# Altium PCB Clock.PcbDoc
Units mm, origin at the board's own origin, x right, y up, seen from the top; angles counter-clockwise.
Board outline 90 x 30 mm, 2 copper layers (Top Layer, Bottom Layer); 35 components, 22 nets, 155 pads, 61 vias.
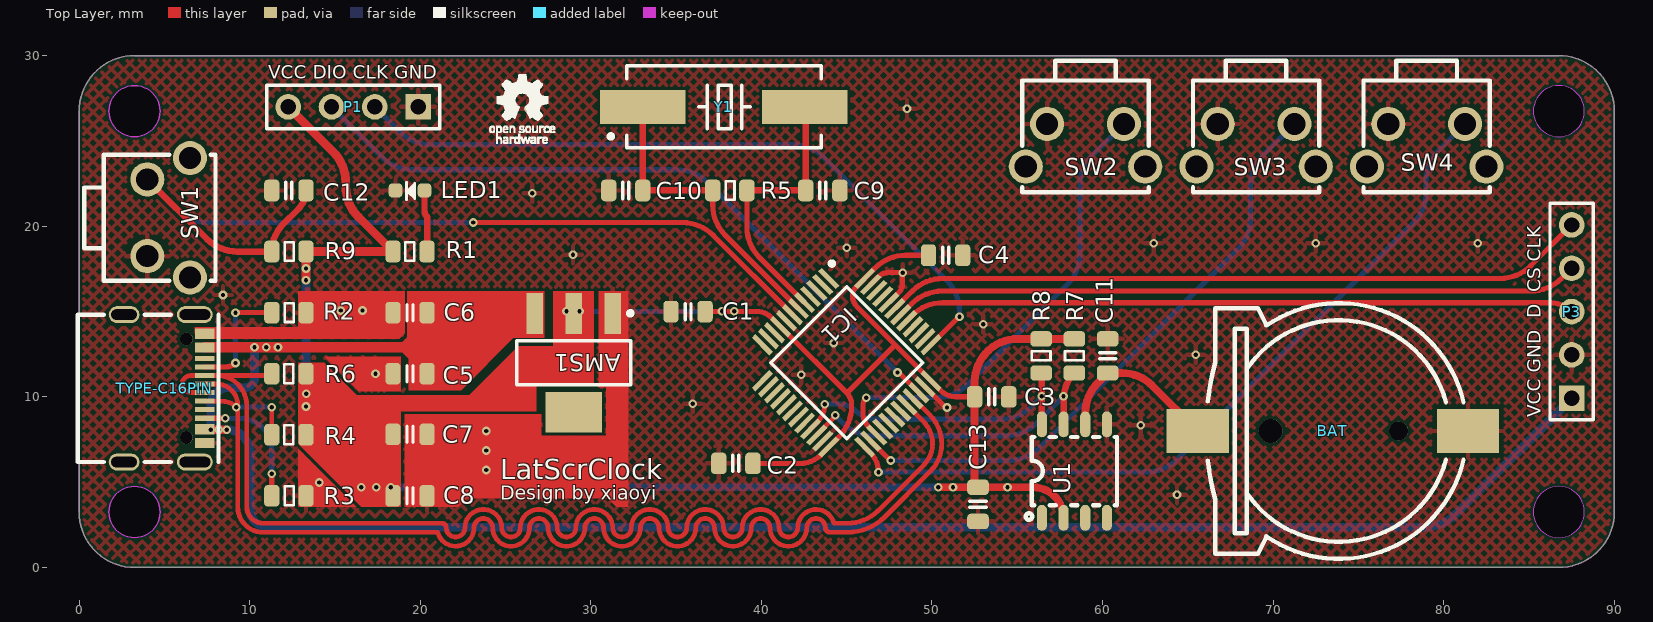
[diagram p0: Top Layer view]
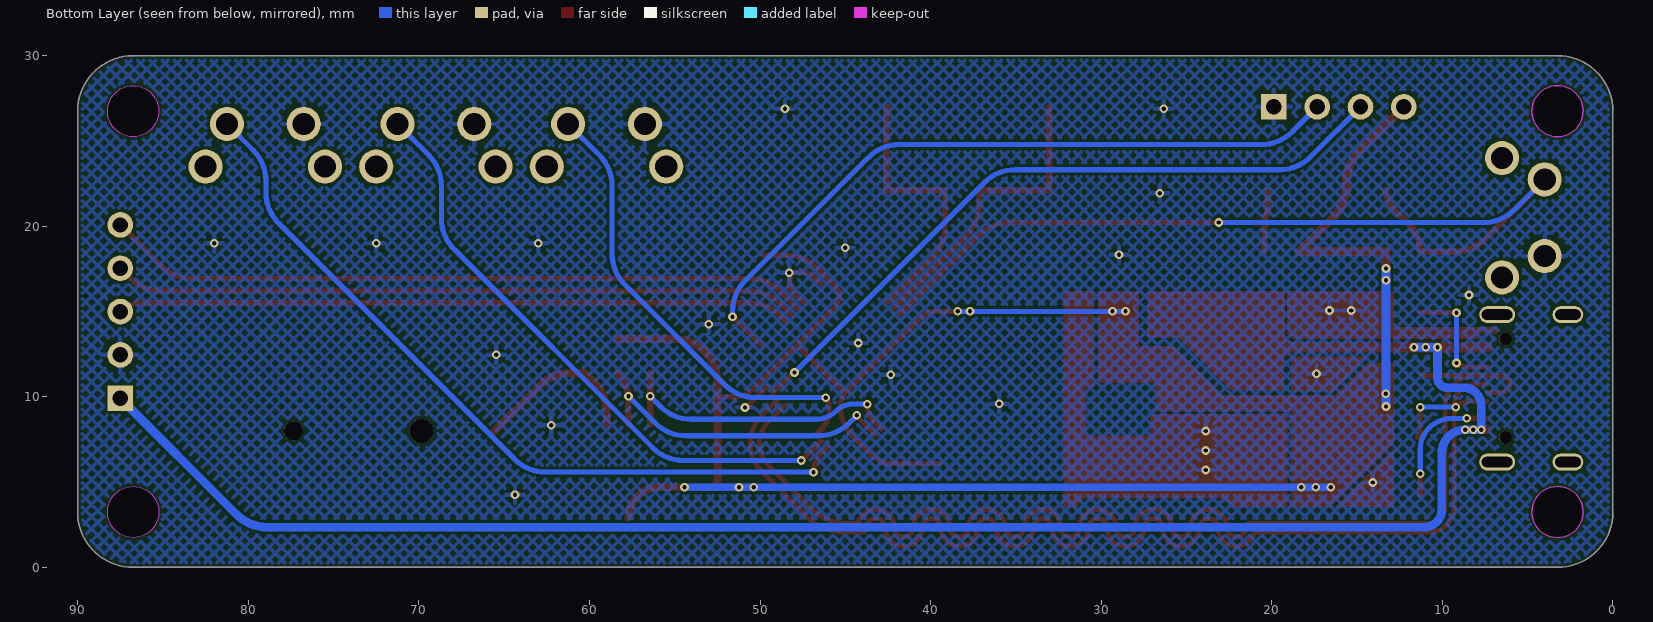
[diagram p1: Bottom Layer view, seen from below]

## Layer stack, top to bottom
Top Solder: solder mask 0.0102, Solder Resist, Dk 3.5
Top Layer: signal copper 0.0356
Dielectric 1: dielectric 0.32, FR-4, Dk 4.8
Bottom Layer: signal copper 0.0356
Bottom Solder: solder mask 0.0102, Solder Resist, Dk 3.5

## Board outline
3.25,0 cw(c3.25,3.25) 0,3.25 0,26.75 cw(c3.25,26.75) 3.25,30 86.75,30 cw(c86.75,26.75) 90,26.75 90,3.25 cw(c86.75,3.25) 86.75,0
cut-out: 3.25,1.75 cw(c3.25,3.25) 1.75,3.25 cw(c3.25,3.25) 3.25,4.75 cw(c3.25,3.25) 4.75,3.25 cw(c3.25,3.25)
cut-out: 3.25,25.25 cw(c3.25,26.75) 1.75,26.75 cw(c3.25,26.75) 3.25,28.25 cw(c3.25,26.75) 4.75,26.75 cw(c3.25,26.75)
cut-out: 85.25,26.75 ccw(c86.75,26.75) 86.75,25.25 ccw(c86.75,26.75) 88.25,26.75 ccw(c86.75,26.75) 86.75,28.25 ccw(c86.75,26.75)
cut-out: 85.25,3.25 ccw(c86.75,3.25) 86.75,1.75 ccw(c86.75,3.25) 88.25,3.25 ccw(c86.75,3.25) 86.75,4.75 ccw(c86.75,3.25)

## Design rules (kind name [scope] priority, off if disabled: settings)
Clearance [All] p1: gap=0.152 ignorepadtopadclearanceinfootprint=FALSE
ComponentClearance [All] p1: gap=0 collisioncheckmode=3 verticalgap=0.254 showdistances=FALSE
DiffPairsRouting [All] p1: maxlimit=0.254 minlimit=0.229 mostfreqgap=0.254 toplayer_minwidth=0.279 toplayer_maxwidth=0.279 toplayer_prefwidth=0.279 bottomlayer_minwidth=0.279 bottomlayer_maxwidth=0.279 bottomlayer_prefwidth=0.279 maxuncoupledlength=20.32
PolygonConnect [All] p1: connectstyle=Relief reliefconductorwidth=0.254 reliefentries=4 polygonreliefangle="90 Angle" airgapwidth=0.254
RoutingVias [All] p1: holewidth=0.711 width=1.27 viastyle="Through Hole" minholewidth=0.711 minwidth=1.27 maxholewidth=0.711 maxwidth=1.27
SolderMaskExpansion [All] p1: expansion=0.102
Width [All] p1: maxlimit=0.762 minlimit=0.254 preferedwidth=0.254
28 further rules are at their usual default settings.

## Components (designator, comment, footprint, x,y, rotation, side; value= is the part's Value field where it differs from the comment)
AMS1 "AMS1117" SOT223 29,12 r270 top
BAT "BAT-CR1220" BAT-CR1220 73.5,8 r0 top
C1 "100nf" C0805 35.7,15 r180 top
C2 "100nf" C0805 38.5,6.1 r180 top
C3 "100nf" C0805 53.5,10 r0 top
C4 "100nf" C0805 50.8,18.3 r0 top
C5 "10uf" C0805 19.4,11.36 r180 top
C6 "100nf" C0805 19.4,14.94 r180 top
C7 "10uf" C0805 19.4,7.805 r0 top
C8 "100nf" C0805 19.4,4.2 r0 top
C9 "20pf" C0805 43.6,22.1 r180 top
C10 "20pf" C0805 32.05,22.1 r0 top
C11 "100nf" C0805 60.3,12.4 r270 top
C12 "100nf" C0805 12.3,22.1 r180 top
C13 "100nf" C0805 52.7,3.7 r270 top
IC1 "STM32F103C8T6" QFP50P900X900X160-48N 45,12 r315 top
LED1 "LED" LED0603-Orange 19.4,22.1 r180 top
P1 "Header 4" HDR1X4 19.88,27 r180 top
P3 "Header 5" HDR1X5 87.5,9.92 r90 top
R1 "3.3k" R0805 20.4,18.52 r180 top
R2 "NC" R0805 11.3,14.94 r0 top
R3 "NC" R0805 11.3,4.2 r0 top
R4 "10k" R0805 13.3,7.78 r180 top
R5 "1M" R0805 37.15,22.1 r0 top
R6 "10k" R0805 13.3,11.36 r180 top
R7 "10k" R0805 58.35,11.4 r90 top
R8 "10k" R0805 56.4,11.4 r90 top
R9 "10k" R0805 11.3,18.52 r0 top
SW1 "DTSA-63N-V-T/R" SW-TH_DTSA-63N-V-T/R 5.25,20.5 r270 top
SW2 "DTSA-63N-V-T/R" SW-TH_DTSA-63N-V-T/R 59,24.75 r180 top
SW3 "DTSA-63N-V-T/R" SW-TH_DTSA-63N-V-T/R 69,24.75 r180 top
SW4 "DTSA-63N-V-T/R" SW-TH_DTSA-63N-V-T/R 79,24.75 r180 top
TYPE-C16PIN "USB" USB3.0-TYPE-C-SMD_16PIN-H-PITCH0.50 5,10.5 r270 top
U1 "DS3231MZ+" SOIC-8_L4.9-W3.9-P1.27-LS6.0-BL 58.35,5.65 r0 top
Y1 "8Mhz" XTAL_49S-SMD 37.8,27 r0 top

## Footprints (in the part's own frame and the unit in brackets; to place one, negate y for a bottom-side part, rotate by r counter-clockwise, add the part's x,y. Pads: shape width x height; smd on the part's side, far side on the other; paste and mask are expansions set on the pad)
BAT-CR1220 [mm] "CR1220"
  round 1.4 hole 1.4 unplated: 0(-3.645,0)
  round 1.1 hole 1.1 unplated: 0(3.855,0)
  rect 3.66x2.6 smd: 1(-7.925,0) 2(7.925,0)
  silkscreen extent -7.33,-7.5 7.66,7.5, body extent -9.14,-7.5 9.36,7.5, height 4
C0805 [mm] "C0805 瓷片电容"
  rrect50% 0.9x1.27 smd: 1(-1,0) 2(1,0)
  silkscreen extent -0.17,-0.48 0.18,0.48, body extent -1,-0.64 1.03,0.64, height 0.41
HDR1X4 [mm] "Connector; Header; 4 Position"
  rect 1.5x1.5 hole 0.9: 1(0,0)
  round 1.5 hole 0.9: 2(2.54,0) 3(5.08,0) 4(7.62,0)
  silkscreen extent -1.27,-1.27 8.89,1.27
HDR1X5 [mm] "Connector; Header; 5 Position"
  rect 1.5x1.5 hole 0.9: 1(0,0)
  round 1.5 hole 0.9: 2(2.54,0) 3(5.08,0) 4(7.62,0) 5(10.16,0)
  silkscreen extent -1.27,-1.27 11.43,1.27
LED0603-Orange [mm] "橙色LED0603"
  rrect50% 0.8x0.813 smd: 1(-0.85,0) 2(0.85,0)
  silkscreen extent -0.28,-0.48 0.2,0.53, body extent -1,-0.53 1.01,0.54, height 0.46
QFP50P900X900X160-48N [mm]
  rect 1.475x0.3 smd: 1(-4.238,2.75) 2(-4.238,2.25) 3(-4.238,1.75) 4(-4.238,1.25) 5(-4.238,0.75) 6(-4.238,0.25) 7(-4.238,-0.25) 8(-4.238,-0.75) 9(-4.238,-1.25) 10(-4.238,-1.75) 11(-4.238,-2.25) 12(-4.238,-2.75) 25(4.238,-2.75) 26(4.238,-2.25) 27(4.238,-1.75) 28(4.238,-1.25) 29(4.238,-0.75) 30(4.238,-0.25) 31(4.238,0.25) 32(4.238,0.75) 33(4.238,1.25) 34(4.238,1.75) 35(4.238,2.25) 36(4.238,2.75)
  rect 0.3x1.475 smd: 13(-2.75,-4.238) 14(-2.25,-4.238) 15(-1.75,-4.238) 16(-1.25,-4.238) 17(-0.75,-4.238) 18(-0.25,-4.238) 19(0.25,-4.238) 20(0.75,-4.238) 21(1.25,-4.238) 22(1.75,-4.238) 23(2.25,-4.238) 24(2.75,-4.238) 37(2.75,4.238) 38(2.25,4.238) 39(1.75,4.238) 40(1.25,4.238) 41(0.75,4.238) 42(0.25,4.238) 43(-0.25,4.238) 44(-0.75,4.238) 45(-1.25,4.238) 46(-1.75,4.238) 47(-2.25,4.238) 48(-2.75,4.238)
  silkscreen extent -4.85,-3.15 3.15,3.62, body extent -4.5,-4.5 4.5,4.5, height 1.6
R0805 [mm]
  rrect50% 0.9x1.27 smd: 1(0,0) 2(2,0)
  silkscreen extent 0.75,-0.55 1.28,0.55, body extent 0,-0.64 2.03,0.63, height 0.41
SOIC-8_L4.9-W3.9-P1.27-LS6.0-BL [mm]
  oval 0.6x1.518 smd: 1(-1.905,-2.74) 2(-0.635,-2.74) 3(0.635,-2.74) 4(1.905,-2.74) 5(1.905,2.74) 6(0.635,2.74) 7(-0.635,2.74) 8(-1.905,2.74)
  silkscreen extent -2.86,-2.86 2.5,2, body extent -2.45,-3 2.45,3, height 1.75
SOT223 [mm] "SOT223, 4-Leads, Body 6.7x7.3mm (max), Pitch 2.29mm, IPC Medium Density"
  rect 2.4x0.95 smd: 1(-2.9,2.29) 2(-2.9,0) 3(-2.9,-2.29)
  rect 2.4x3.3 smd: 4(2.9,0)
  silkscreen extent -3.02,-3.35 1.3,3.44, body extent -3.65,-3.35 3.65,3.35, height 1.8
SW-TH_DTSA-63N-V-T/R [mm]
  round 2 hole 1.3: 1(-2.25,-1.25) 2(2.25,-1.25) 3(-3.5,1.25) 4(3.5,1.25)
  silkscreen extent -3.7,-4.95 3.7,2.75, body extent -3.7,-5.05 3.7,2.85, height 7.01
USB3.0-TYPE-C-SMD_16PIN-H-PITCH0.50 [mm]
  oval 1x2.099 hole 0.61 slot 1.8 at 90 deg: 1(-4.32,1.787) 2(4.32,1.787)
  oval 1x1.799 hole 0.61 slot 1.5 at 90 deg: 3(-4.32,-2.363) 4(4.32,-2.363)
  rect 0.6x1.15 smd: A1B12(-3.2,2.363) A4B9(-2.4,2.363) B1A12(3.2,2.363) B4A9(2.4,2.363)
  rect 0.3x1.15 smd: A5(-1.25,2.363) A6(-0.25,2.363) A7(0.25,2.363) A8(-1.75,2.363) B5(1.75,2.363) B6(0.75,2.363) B7(-0.75,2.363) B8(1.25,2.363)
  round 0.75 hole 0.75 unplated: ""(-2.89,1.288) ""(2.89,1.288)
  silkscreen extent -4.32,-5.08 4.32,3.18, body extent -4.47,-4.95 4.47,2.63, height 3.25
XTAL_49S-SMD [mm] "贴片"
  rect 5x2 smd: 1(-4.75,0) 2(4.75,0)
  silkscreen extent -6.75,-2.4 5.7,2.4, body extent -6.7,-2.46 6.7,2.44, height 4

## Part data
AMS1: "Power"
C1 C2 C3 C4 C5 C6 C7 C8 C9 C10 C11 C12 C13: library part CAP, "无极电容", accuracy=20%
IC1: "Integrated Circuit", Manufacturer_Name=STMicroelectronics, Mouser Part Number=511-STM32F103C8T6, RS Part Number=0402279P, Allied_Number=70390993, Allied Price/Stock=http://www.alliedelec.com/stmicroelectronics-stm32f103c8t6/70390993/, Datasheet Link=http://www.st.com/st-web-ui/static/active/en/resource/technical/document/datasheet/CD00161566.pdf, Height=1.6mm, Manufacturer_Part_Number=STM32F103C8T6, Mouser Price/Stock=https://www.mouser.com/Search/Refine.aspx?Keyword=511-STM32F103C8T6, RS Price/Stock=http://uk.rs-online.com/web/p/products/0402279P
LED1: "发光二极管"
P1: "Header, 4-Pin", LatestRevisionDate=17-Jul-2002, LatestRevisionNote="Re-released for DXP Platform.", Publisher="Altium Limited"
P3: "Header, 5-Pin", LatestRevisionDate=17-Jul-2002, LatestRevisionNote="Re-released for DXP Platform.", Publisher="Altium Limited"
R1 R2 R3 R4 R5 R6 R7 R8 R9: library part RES, "电阻"
SW1 SW2 SW3 SW4: library part KEY_ASIDE_DTSA-63N-V-T/R, BOM_Manufacturer=Diptronics, BOM_Manufacturer Part=DTSA-63N-V-T/R, BOM_Supplier=LCSC, BOM_Supplier Part=C483865, Contributor=LCSC, spicePre=S, spiceSymbolName=DTSA-63N-V-T/R
TYPE-C16PIN: library part type-c-16p
U1: BOM_LCSC Assembly=Yes, BOM_Manufacturer=MAXIM, BOM_Manufacturer Part=DS3231MZ+, BOM_Supplier=LCSC, BOM_Supplier Part=C107410, SMT Type=Extend, spicePre=U, spiceSymbolName=DS3231MZ+
Y1: library part XTAL, "无源晶振"

## Via types
v1: diameter 0.508, hole 0.254, Top Layer to Bottom Layer, tented both sides, 61 vias

## Nets (pads, with @x,y where several pads share a name; then routed paths per layer and width w, separated by ;. In a path a pad name is that pad's centre, name@x,y a point inside that pad or via, vN(x,y) a via of type N, cw(c..) or ccw(c..) an arc to the next point about the centre after c; other vN are vias at no path point)
3V3: AMS1.2 C1.1 C2.1 C3.1 C4.1 C7.1 C8.1 C13.1 IC1.9 IC1.24 IC1.36 IC1.48 P1.4 R1.2 R4.1 R6.1 R7.2 R8.2 R9.2 U1.2 | length 133.2
  Top Layer w0.305: C1.1 cw(c36.728,14.972) 36.728,15.011 v1(37.694,15.011) v1(38.405,15.011) 39.7,15.011 cw(c39.7,13.754) 40.589,14.643 IC1.9 45.01,10.222 ; C2.1 39.504,6.096 42.266,6.096 ccw(c42.266,7.833) 43.494,6.605 IC1.24 44.544,7.655 ccw(c42.748,9.451) 45.288,9.451 45.288,9.55 ccw(c44.338,9.55) 45.01,10.222 ; 47.808,13.081 cw(c47.662,13.081) 47.766,12.978 45.01,10.222 ; C4.1 48.463,18.3 ccw(c48.463,15.76) 46.667,17.556 IC1.48 45.553,16.442 ccw(c46.069,15.926) 45.339,15.926 ccw(c46.246,15.926) 45.605,15.284 IC1.36 50.526,10.363 ccw(c51.384,11.221) 51.384,10.008 52.492,10.008 C3.1
  Top Layer w0.457: v1(50.368,4.7) v1(51.232,4.7) C13.1 ; U1.2 ccw(c55.925,2.91) 55.925,4.7 v1(54.432,4.7) C13.1 ; R7.2 R8.2 55.04,13.4 ccw(c55.04,10.86) 52.5,10.86 C3.1 52.5,5.183 ccw(c53.183,5.183) C13.1
  Top Layer w0.508: P1.4 14.89,24.37 cw(c13.094,22.574) 15.634,22.574 15.634,22.338 ccw(c18.174,22.338) 16.378,20.542 R1.2 R9.2 v1(13.3,16.84)
  Bottom Layer w0.305: v1(28.575,15.011) v1(37.694,15.011) v1(38.405,15.011)
  Bottom Layer w0.457: v1@16.535,4.692 v1(16.543,4.7) v1(50.368,4.7) v1(51.232,4.7) v1(54.432,4.7)
  Bottom Layer w0.508: v1(13.3,9.433) v1(13.3,16.84) v1(13.3,17.526)
  other v1: 17.424,4.7 18.263,4.7 13.31,10.185 29.337,15.011
CLK: IC1.43 P3.5 | length 41.5
  Top Layer w0.305: IC1.43 48.844,16.197 cw(c50.64,14.401) 50.64,16.941 83.309,16.941 ccw(c83.309,19.481) 85.105,17.685 P3.5
CS: IC1.42 P3.4 | length 40.2
  Top Layer w0.305: IC1.42 48.815,15.461 cw(c50.611,13.665) 50.611,16.205 85.113,16.205 ccw(c85.113,18.745) 86.909,16.949 P3.4
DATA: IC1.41 P3.3 | length 39.4
  Top Layer w0.305: IC1.41 48.836,14.775 cw(c50.632,12.979) 50.632,15.519 86.246,15.519 cw(c86.246,13.746) P3.3
GND: AMS1.1 BAT.2 C1.2 C2.2 C3.2 C4.2 C5.2 C6.2 C7.2 C8.2 C9.1 C10.1 C11.1 C12.2 C13.2 IC1.8 IC1.23 IC1.35 IC1.44 IC1.47 LED1.2 P1.1 P3.2 R2.2 R3.2 SW1.2 SW2.2 SW3.2 SW4.2 TYPE-C16PIN.A1B12 TYPE-C16PIN.B1A12 U1.5 | length 6
  Top Layer w0.305: IC1.47 46.845,17.027 cw(c47.498,16.374) 47.498,17.297 48.224,17.297 cw(c48.224,17.211) v1(48.285,17.272) ccw(c48.347,17.211) 48.26,17.211 48.26,16.586 cw(c47.619,16.586) 48.072,16.133 IC1.44 ; IC1.35 50.762,9.42 ccw(c50.876,9.534) v1(50.876,9.373)
  other v1: 64.364,4.267 14.072,4.978 23.876,5.715 23.876,6.858 23.876,8 62.23,8.331 35.966,9.601 42.342,11.303 17.374,11.354 65.456,12.471 44.247,13.157 53.01,14.259 15.342,15.062 16.612,15.062 8.433,15.977 28.956,18.339 45.009,18.745 62.992,18.999 72.5,18.999 81.991,18.999 26.568,21.946 26.34,26.899 48.539,26.899
KEY1: IC1.27 SW2.1 | length 27.5
  Top Layer w0.305: v1(46.152,9.957) ccw(c46.642,9.466) 45.949,9.466 45.949,9.093 ccw(c47.196,9.093) 46.314,8.211 IC1.27
  Bottom Layer w0.305: v1(46.152,9.957) 50.256,9.957 ccw(c50.256,12.497) 52.052,10.701 57.93,16.579 ccw(c56.134,18.375) 58.674,18.375 58.674,22.372 cw(c61.214,22.372) 59.418,24.168 SW2.1
KEY2: IC1.26 SW3.1 | length 35.5
  Top Layer w0.305: IC1.26 47.523,6.295 ccw(c47.574,6.346) v1(47.574,6.274)
  Bottom Layer w0.305: v1(47.574,6.274) 54.498,6.274 ccw(c54.498,8.814) 56.294,7.018 67.938,18.662 ccw(c66.142,20.458) 68.682,20.458 68.682,22.379 cw(c71.222,22.379) 69.426,24.175 SW3.1
KEY3: IC1.25 SW4.1 | length 45.9
  Top Layer w0.305: IC1.25 46.396,6.715 cw(c45.27,5.588) v1(46.863,5.588)
  Bottom Layer w0.305: v1(46.863,5.588) 62.575,5.588 ccw(c62.575,8.128) 64.371,6.332 78.225,20.186 ccw(c76.429,21.982) 78.969,21.982 78.969,22.666 cw(c81.509,22.666) 79.713,24.462 SW4.1
NetBAT_1: BAT.1 C11.2 U1.6 | length 10
  Top Layer w0.457: U1.6 58.985,9.033 cw(c61.525,9.033) 59.729,10.829 C11.2 61.123,11.4 cw(c61.123,8.86) 62.919,10.656 BAT.1
NetC9_2: C9.2 IC1.5 R5.2 Y1.2 | length 16.2
  Top Layer w0.305: R5.2 39.15,19.963 ccw(c41.69,19.963) 39.894,18.167 IC1.5
  Top Layer w0.381: R5.2 C9.2 42.6,26.879 ccw(c42.429,26.879) Y1.2
NetC10_2: C10.2 IC1.6 R5.1 Y1.1 | length 17.9
  Top Layer w0.305: R5.1 37.15,21.256 ccw(c39.69,21.256) 37.894,19.46 IC1.6
  Top Layer w0.381: Y1.1 C10.2 R5.1
NetLED1_1: LED1.1 R1.1 | length 3.6
  Top Layer w0.381: LED1.1 20.25,20.891 ccw(c20.662,20.891) 20.371,20.599 cw(c20.3,20.529) 20.4,20.529 R1.1
NetR2_1: R2.1 TYPE-C16PIN.A5 | length 7
  Top Layer w0.305: TYPE-C16PIN.A5 8.593,11.75 ccw(c8.593,12.565) v1(9.169,11.989) ; v1(9.169,14.94) R2.1
  Bottom Layer w0.305: v1(9.169,11.989) v1(9.169,14.94)
NetR3_1: R3.1 TYPE-C16PIN.B5 | length 7.7
  Top Layer w0.305: TYPE-C16PIN.B5 8.53,8.75 cw(c8.53,8.708) v1(8.56,8.738) ; R3.1 v1(11.3,5.5)
  Bottom Layer w0.305: v1(8.56,8.738) 9.449,8.738 cw(c9.449,6.886) 11.3,6.886 v1(11.3,5.5)
RESET: C12.1 IC1.7 R9.1 SW1.1 | length 54.1
  Top Layer w0.305: v1(23.114,20.218) 35.376,20.218 cw(c35.376,17.678) 37.172,19.474 IC1.7
  Top Layer w0.381: SW1.1 7.486,19.264 ccw(c9.282,21.06) 9.282,18.52 R9.1 cw(c13.553,18.52) 11.96,20.113 12.843,20.996 ccw(c11.739,22.1) C12.1
  Bottom Layer w0.305: SW1.1 5.788,20.962 ccw(c7.584,22.758) 7.584,20.218 v1(23.114,20.218)
SCL: IC1.21 R8.1 U1.8 | length 18.2
  Top Layer w0.305: IC1.21 43.268,8.5 ccw(c42.192,9.576) v1(43.713,9.576)
  Top Layer w0.381: R8.1 cw(c56.291,11.291) 56.445,11.291 U1.8
  Bottom Layer w0.305: v1(43.713,9.576) 44.561,9.576 cw(c44.561,8.188) 45.542,9.169 ccw(c46.707,10.335) 46.707,8.687 54.04,8.687 ccw(c54.04,11.227) 55.837,9.431 v1(56.439,10.033)
SDA: IC1.22 R7.1 U1.7 | length 19.4
  Top Layer w0.305: IC1.22 44.275,8.801 ccw(c44.161,8.915) v1(44.323,8.915)
  Top Layer w0.381: U1.7 57.715,9.867 cw(c59.883,9.867) R7.1
  Bottom Layer w0.305: v1(44.323,8.915) 44.773,8.466 ccw(c46.569,10.262) 46.569,7.722 54.345,7.722 ccw(c54.345,10.262) 56.141,8.466 v1(57.709,10.033)
SWCLK: IC1.37 P1.2 | length 42.2
  Top Layer w0.305: IC1.37 v1@51.584,14.694 ; v1@51.584,14.695 cw(c51.613,14.665) v1(51.613,14.707)
  Bottom Layer w0.305: P1.2 18.806,25.534 ccw(c20.602,27.33) 20.602,24.79 41.848,24.79 cw(c41.848,22.25) 43.645,24.046 50.869,16.822 cw(c49.073,15.026) 51.613,15.026 v1(51.613,14.707)
SWDIO: IC1.34 P1.3 | length 41.2
  Top Layer w0.305: v1(47.981,11.43) cw(c47.981,11.275) 48.09,11.385 IC1.34
  Bottom Layer w0.305: P1.3 17.739,24.061 ccw(c19.535,25.857) 19.535,23.317 35.041,23.317 cw(c35.041,20.777) 36.837,22.573 v1(47.981,11.43)
USB_DM: IC1.32 R6.2 TYPE-C16PIN.A7 TYPE-C16PIN.B7 | length 74.5
  Top Layer w0.279: TYPE-C16PIN.A7 6.545,10.25 cw(c6.545,10.75) 6.045,10.75 cw(c6.545,10.75) 6.545,11.25 TYPE-C16PIN.B7 8.077,11.25 ; R6.2 cw(c11.034,11.626) 11.034,11.25 8.077,11.25 ; IC1.32 49.484,8.577 cw(c48.146,7.239) 50.038,7.239 cw(c48.321,7.239) 49.535,6.025 46.845,3.335 cw(c45.049,5.131) 45.049,2.591 44.251,2.591 ccw(c43.205,2.324) 42.126,2.324 cw(c41.58,2.324) 41.034,2.324 ccw(c39.954,2.324) 38.875,2.324 cw(c38.329,2.324) 37.782,2.324 ccw(c36.703,2.324) 35.623,2.324 cw(c35.077,2.324) 34.531,2.324 ccw(c33.452,2.324) 32.372,2.324 cw(c31.826,2.324) 31.28,2.324 ccw(c30.201,2.324) 29.121,2.324 cw(c28.575,2.324) 28.029,2.324 ccw(c26.949,2.324) 25.87,2.324 cw(c25.324,2.324) 24.778,2.324 ccw(c23.698,2.324) 22.619,2.324 cw(c22.073,2.324) 21.526,2.324 ccw(c21.26,2.324) 21.26,2.591 10.795,2.591 cw(c10.795,3.556) 9.83,3.556 9.83,9.497 ccw(c8.077,9.497) 8.077,11.25
USB_DP: IC1.33 R4.2 TYPE-C16PIN.A6 TYPE-C16PIN.B6 | length 75.3
  Top Layer w0.279: TYPE-C16PIN.B6 8.375,9.75 cw(c8.375,8.555) v1(9.22,9.4) ; TYPE-C16PIN.A6 8.077,10.75 cw(c8.077,9.531) 9.296,9.531 9.296,3.556 ccw(c10.795,3.556) 10.795,2.057 21.027,2.057 ccw(c22.073,2.324) 23.152,2.324 cw(c23.698,2.324) 24.244,2.324 ccw(c25.324,2.324) 26.403,2.324 cw(c26.949,2.324) 27.495,2.324 ccw(c28.575,2.324) 29.654,2.324 cw(c30.201,2.324) 30.747,2.324 ccw(c31.826,2.324) 32.906,2.324 cw(c33.452,2.324) 33.998,2.324 ccw(c35.077,2.324) 36.157,2.324 cw(c36.703,2.324) 37.249,2.324 ccw(c38.329,2.324) 39.408,2.324 cw(c39.954,2.324) 40.5,2.324 ccw(c41.58,2.324) 42.659,2.324 cw(c43.205,2.324) 43.752,2.324 ccw(c44.018,2.324) 44.018,2.057 45.049,2.057 ccw(c45.049,5.131) 47.222,2.958 49.912,5.648 ccw(c48.321,7.239) 50.571,7.239 ccw(c48.146,7.239) 49.861,8.954 IC1.33@48.904,9.911 ; v1(11.3,9.4) R4.2 R4.2@11.47,7.61
  Bottom Layer w0.279: v1(9.22,9.4) v1(11.3,9.4)
VCC: AMS1.3 C5.1 C6.1 P3.1 TYPE-C16PIN.A4B9 TYPE-C16PIN.B4A9 | length 113.2
  Top Layer w0.508: TYPE-C16PIN.B4A9 ccw(c7.385,8.1) 7.385,8.077 v1(7.722,8.077) v1(8.191,8.077) v1(8.661,8.077) ; C5.1 20.4,11.496 18.996,12.9 20.4,14.304 C6.1
  Top Layer w0.61: TYPE-C16PIN.A4B9 v1(10.287,12.9) 18.996,12.9
  Bottom Layer w0.508: v1@10.287,12.849 10.287,11.125 cw(c9.703,11.125) 9.703,10.541 8.763,10.541 ccw(c8.763,9.5) 7.722,9.5 v1(7.722,8.077) v1(8.191,8.077) v1(8.661,8.077) cw(c8.661,6.706) 10.033,6.706 10.033,3.378 ccw(c11.049,3.378) 11.049,2.362 78.89,2.362 ccw(c78.89,4.902) 80.686,3.106 P3.1 ; v1(10.287,12.9) 10.287,12.903 v1(10.973,12.903) v1(11.659,12.903)
pads on no net: AMS1.4 BAT.0 IC1.1 IC1.2 IC1.3 IC1.4 IC1.10 IC1.11 IC1.12 IC1.13 IC1.14 IC1.15 IC1.16 IC1.17 IC1.18 IC1.19 IC1.20 IC1.28 IC1.29 IC1.30 IC1.31 IC1.38 IC1.39 IC1.40 IC1.45 IC1.46 SW1.3 SW1.4 SW2.3 SW2.4 SW3.3 SW3.4 SW4.3 SW4.4 TYPE-C16PIN. TYPE-C16PIN.1 TYPE-C16PIN.2 TYPE-C16PIN.3 TYPE-C16PIN.4 TYPE-C16PIN.A8 TYPE-C16PIN.B8 U1.1 U1.3 U1.4

## Polygon pours and split planes (outlines as drawn)
GND on Bottom Layer "Bottom Layer-GND" (hatched 45Degree grid 0.508 track 0.203, remove dead copper, pour order 2): -2,32 92,32 92,-2 -2,-2
GND on Top Layer "Top Layer-GND" (hatched 45Degree grid 0.508 track 0.203, remove dead copper, pour order 4): -1.4,32 92.4,32 92.4,-2.4 -1.4,-2.4

## Keep-outs
Keep-Out Layer:
  lines w0.013: 0,3.25 ccw(c3.25,3.25) 3.25,0 86.75,0 ccw(c86.75,3.25) 90,3.25 90,26.75 ccw(c86.75,26.75) 86.75,30 3.25,30 ccw(c3.25,26.75) 0,26.75 0,3.25 ; 1.75,3.25 cw(c3.25,3.25) 3.25,4.75 cw(c3.25,3.25) 4.75,3.25 cw(c3.25,3.25) 3.25,1.75 cw(c3.25,3.25) 1.75,3.25 ; 1.75,26.75 cw(c3.25,26.75) 3.25,28.25 cw(c3.25,26.75) 4.75,26.75 cw(c3.25,26.75) 3.25,25.25 cw(c3.25,26.75) 1.75,26.75 ; 85.25,3.25 cw(c86.75,3.25) 86.75,4.75 cw(c86.75,3.25) 88.25,3.25 cw(c86.75,3.25) 86.75,1.75 cw(c86.75,3.25) 85.25,3.25 ; 85.25,26.75 cw(c86.75,26.75) 86.75,28.25 cw(c86.75,26.75) 88.25,26.75 cw(c86.75,26.75) 86.75,25.25 cw(c86.75,26.75) 85.25,26.75

## Other copper
Top Layer:
  region net GND: 32.207,4.064 32.207,3.556 31.496,3.556 30.988,4.064
  region net GND: 32.207,7.3 32.207,16.18 30.459,16.18 30.459,10.554 30.904,10.554 30.904,7.3
  region net GND: 19.08,8.968 27.096,8.968 27.096,7.722 32.207,7.722 32.207,4.064 22.733,4.064 22.225,3.556 19.08,3.556
  region net GND: 7.925,13.716 7.925,13.4 18.764,13.4 19.08,13.716
  region net GND: 6.782,14.072 12.843,14.072 12.843,16.205 19.08,16.205 19.08,13.716 6.782,13.716
  region net VCC: 19.329,10.4 22.405,10.4 25.467,13.462 27.28,13.462 27.28,16.205 19.253,16.205 19.253,13.496 18.716,12.958 19.329,12.345
  region net 3V3: 15.926,10.084 22.86,10.084 25.756,12.979 27.788,12.979 27.788,16.18 30.175,16.18 30.175,10.82 26.797,10.82 26.797,9.144 18.847,9.144 18.847,7.163
  region net GND: 14.409,12.341 16.407,10.343 18.872,10.343 18.872,12.341
  region net GND: 12.843,3.556 16.244,3.556 12.843,6.957
  region net 3V3: 14.365,12 18.847,7.518 18.847,3.556 16.535,3.556 12.852,7.239 12.852,12

## Silkscreen, mask and mechanical layers (free items; w line width, h text height)
Top Overlay:
  drawing of 649 lines, arcs and shapes, not listed
  text "VCC DIO CLK GND" at 11.1,28.65 h0.8
  text "VCC GND  D  CS CLK" at 85.689,8.8 h0.8 r90
  text "LatScrClock" at 24.7,4.8 h2
  text "Design by xiaoyi" at 24.7,3.675 h1.4
Mechanical 1:
  circle w0.127: c86.75,3.25 r1.5
  circle w0.127: c86.75,26.75 r1.5
  circle w0.127: c3.25,26.75 r1.5
  circle w0.127: c3.25,3.25 r1.5
  lines w0.127: 0,3.25 ccw(c3.25,3.25) 3.25,0 86.75,0 ccw(c86.75,3.25) 90,3.25 90,26.75 ccw(c86.75,26.75) 86.75,30 3.25,30 ccw(c3.25,26.75) 0,26.75 0,3.25